# EAGLE board PCB1_v1 (EAGLE 9.3.0)

Size 190.7 x 218 mm. Coordinates in mm from the lower left corner, seen from the top.
Outline: 49.68,207.97 arc-50 141.02,207.97 arc-110 141.6,204.74 126.46,189.61 arc90 126.46,186.78 158.99,154.26 arc90 161.82,154.26 180.66,173.09 arc-99 183.69,172.85 arc-6 190.3,162.53 arc-88 189.22,158.35 173.19,148.56 arc59 171.75,146 171.75,72 arc59 173.19,69.44 189.22,59.65 arc-88 190.3,55.48 arc-6 183.69,45.15 arc-99 180.66,44.91 161.82,63.75 arc90 158.99,63.75 126.46,31.22 arc90 126.46,28.39 141.6,13.26 arc-110 141.02,10.03 arc-50 49.68,10.03 arc-110 49.11,13.26 64.24,28.39 arc90 64.24,31.22 31.71,63.75 arc90 28.88,63.75 10.05,44.91 arc-99 7.01,45.15 arc-6 0.4,55.48 arc-88 1.49,59.65 17.52,69.44 arc59 18.95,72 18.95,146 arc59 17.52,148.56 1.49,158.35 arc-88 0.4,162.53 arc-6 7.01,172.85 arc-99 10.05,173.09 28.88,154.26 arc90 31.71,154.26 64.24,186.78 arc90 64.24,189.61 49.11,204.74 arc-110 49.68,207.97
Outline: circle at 123.57,171.15 radius 1.6
Outline: circle at 143.36,151.36 radius 1.6
Outline: circle at 116.85,167.27 radius 1.6
Outline: circle at 127.45,177.87 radius 1.6
Outline: circle at 150.08,155.24 radius 1.6
Outline: circle at 139.47,144.64 radius 1.6
Outline: circle at 67.14,171.15 radius 1.6
Outline: circle at 47.34,151.36 radius 1.6
Outline: circle at 73.86,167.27 radius 1.6
Outline: circle at 63.25,177.87 radius 1.6
Outline: circle at 40.62,155.24 radius 1.6
Outline: circle at 51.23,144.64 radius 1.6
Outline: circle at 123.57,46.85 radius 1.6
Outline: circle at 143.36,66.64 radius 1.6
Outline: circle at 116.85,50.73 radius 1.6
Outline: circle at 127.45,40.13 radius 1.6
Outline: circle at 150.08,62.76 radius 1.6
Outline: circle at 139.47,73.36 radius 1.6
Outline: circle at 67.14,46.85 radius 1.6
Outline: circle at 47.34,66.64 radius 1.6
Copper layers (1*16): Top 0.035mm / dielectric 1.5mm / Bottom 0.035mm
Design rules "default": minimum track width 6mil, minimum drill 0.35mm, track to track 6mil, track to pad 6mil, pad to pad 6mil, via to via 6mil, smd to smd 6mil, copper to edge 40mil, drill to drill 6mil, minimum pad ring 10mil, minimum via ring 8mil, stop-mask expansion 4mil, vias tented up to drill 0mil, thermal gap 10mil

## Footprints (pad centres in the part's own frame; a part is rotated, then mirrored left to right if it is on the bottom)
C0603 = smd 1.1 x 1: 1 -0.85,0; 2 0.85,0
3528 = smd 1.5 x 2.6: A -1.5,0; C 1.5,0
TEMT6000 = smd 1.1 x 0.8: BASE -1.87,-0.65; EMITTER -1.87,0.65 | smd 1.1 x 1: COLLECTOR 1.86,0.01
R0603 = smd 1 x 1.1: 1 -0.85,0; 2 0.85,0
SOIC-24 = smd 2 x 0.6: P1 -4.7,7; P2 -4.7,5.73; P3 -4.7,4.46; P4 -4.7,3.19; P5 -4.7,1.92; P6 -4.7,0.65; P7 -4.7,-0.62; P8 -4.7,-1.89; P9 -4.7,-3.16; P10 -4.7,-4.43; P11 -4.7,-5.7; P12 -4.7,-6.97; P13 4.7,-6.97; P14 4.7,-5.7; P15 4.7,-4.43; P16 4.7,-3.16; P17 4.7,-1.89; P18 4.7,-0.62; P19 4.7,0.65; P20 4.7,1.92; P21 4.7,3.19; P22 4.7,4.46; P23 4.7,5.73; P24 4.7,7

## Placement (x,y rotation side)
1C1  1uF  [C0603]  78.84,117.89 0 top
1LED1  3528LED  [3528]  78.84,111.54 0 top
1LED2  3528LED  [3528]  73.76,111.54 0 top
1LED4  3528LED  [3528]  68.68,111.54 0 top
1LED5  3528LED  [3528]  55.35,114.72 0 top
1PT1  TEMT6000  [TEMT6000]  73.76,128.05 0 top
1PT2  TEMT6000  [TEMT6000]  68.68,128.05 0 top
1PT3  TEMT6000  [TEMT6000]  55.35,109.64 0 top
1PT4  TEMT6000  [TEMT6000]  80.11,133.13 0 top
1PT5  TEMT6000  [TEMT6000]  75.03,133.13 0 top
1R1  2k  [R0603]  78.84,122.97 0 top
U$1  CD74HC4067  [SOIC-24]  -6.25,8.04 0 top

## Library data of the parts
1C1 = rcl; SPICEPREFIX: C
1LED1 1LED2 1LED4 1LED5 U$1 = JH
1PT1-1PT5 = SparkFun-Sensors; PROD_ID: COMP-08569; SF_ID: COM-08348
1R1 = rcl; SPICEPREFIX: R

## Nets
3.3V: 1C1.1 1LED1.A 1LED2.A 1LED4.A 1LED5.A 1PT1.COLLECTOR 1PT2.COLLECTOR 1PT3.COLLECTOR 1PT4.COLLECTOR 1PT5.COLLECTOR U$1.P24
GND: 1C1.2 1LED1.C 1LED2.C 1LED4.C 1LED5.C 1R1.1 U$1.P12
N$1: 1R1.2 U$1.P1

## Tracks (layer width: path | path; a pad name or v marks a point on that pad's centre or on a via)
3.3V  (10 unrouted)
GND  (6 unrouted)
N$1  (1 unrouted)